# EAGLE board BattleBitsManualNoSound (EAGLE 9.3.2)
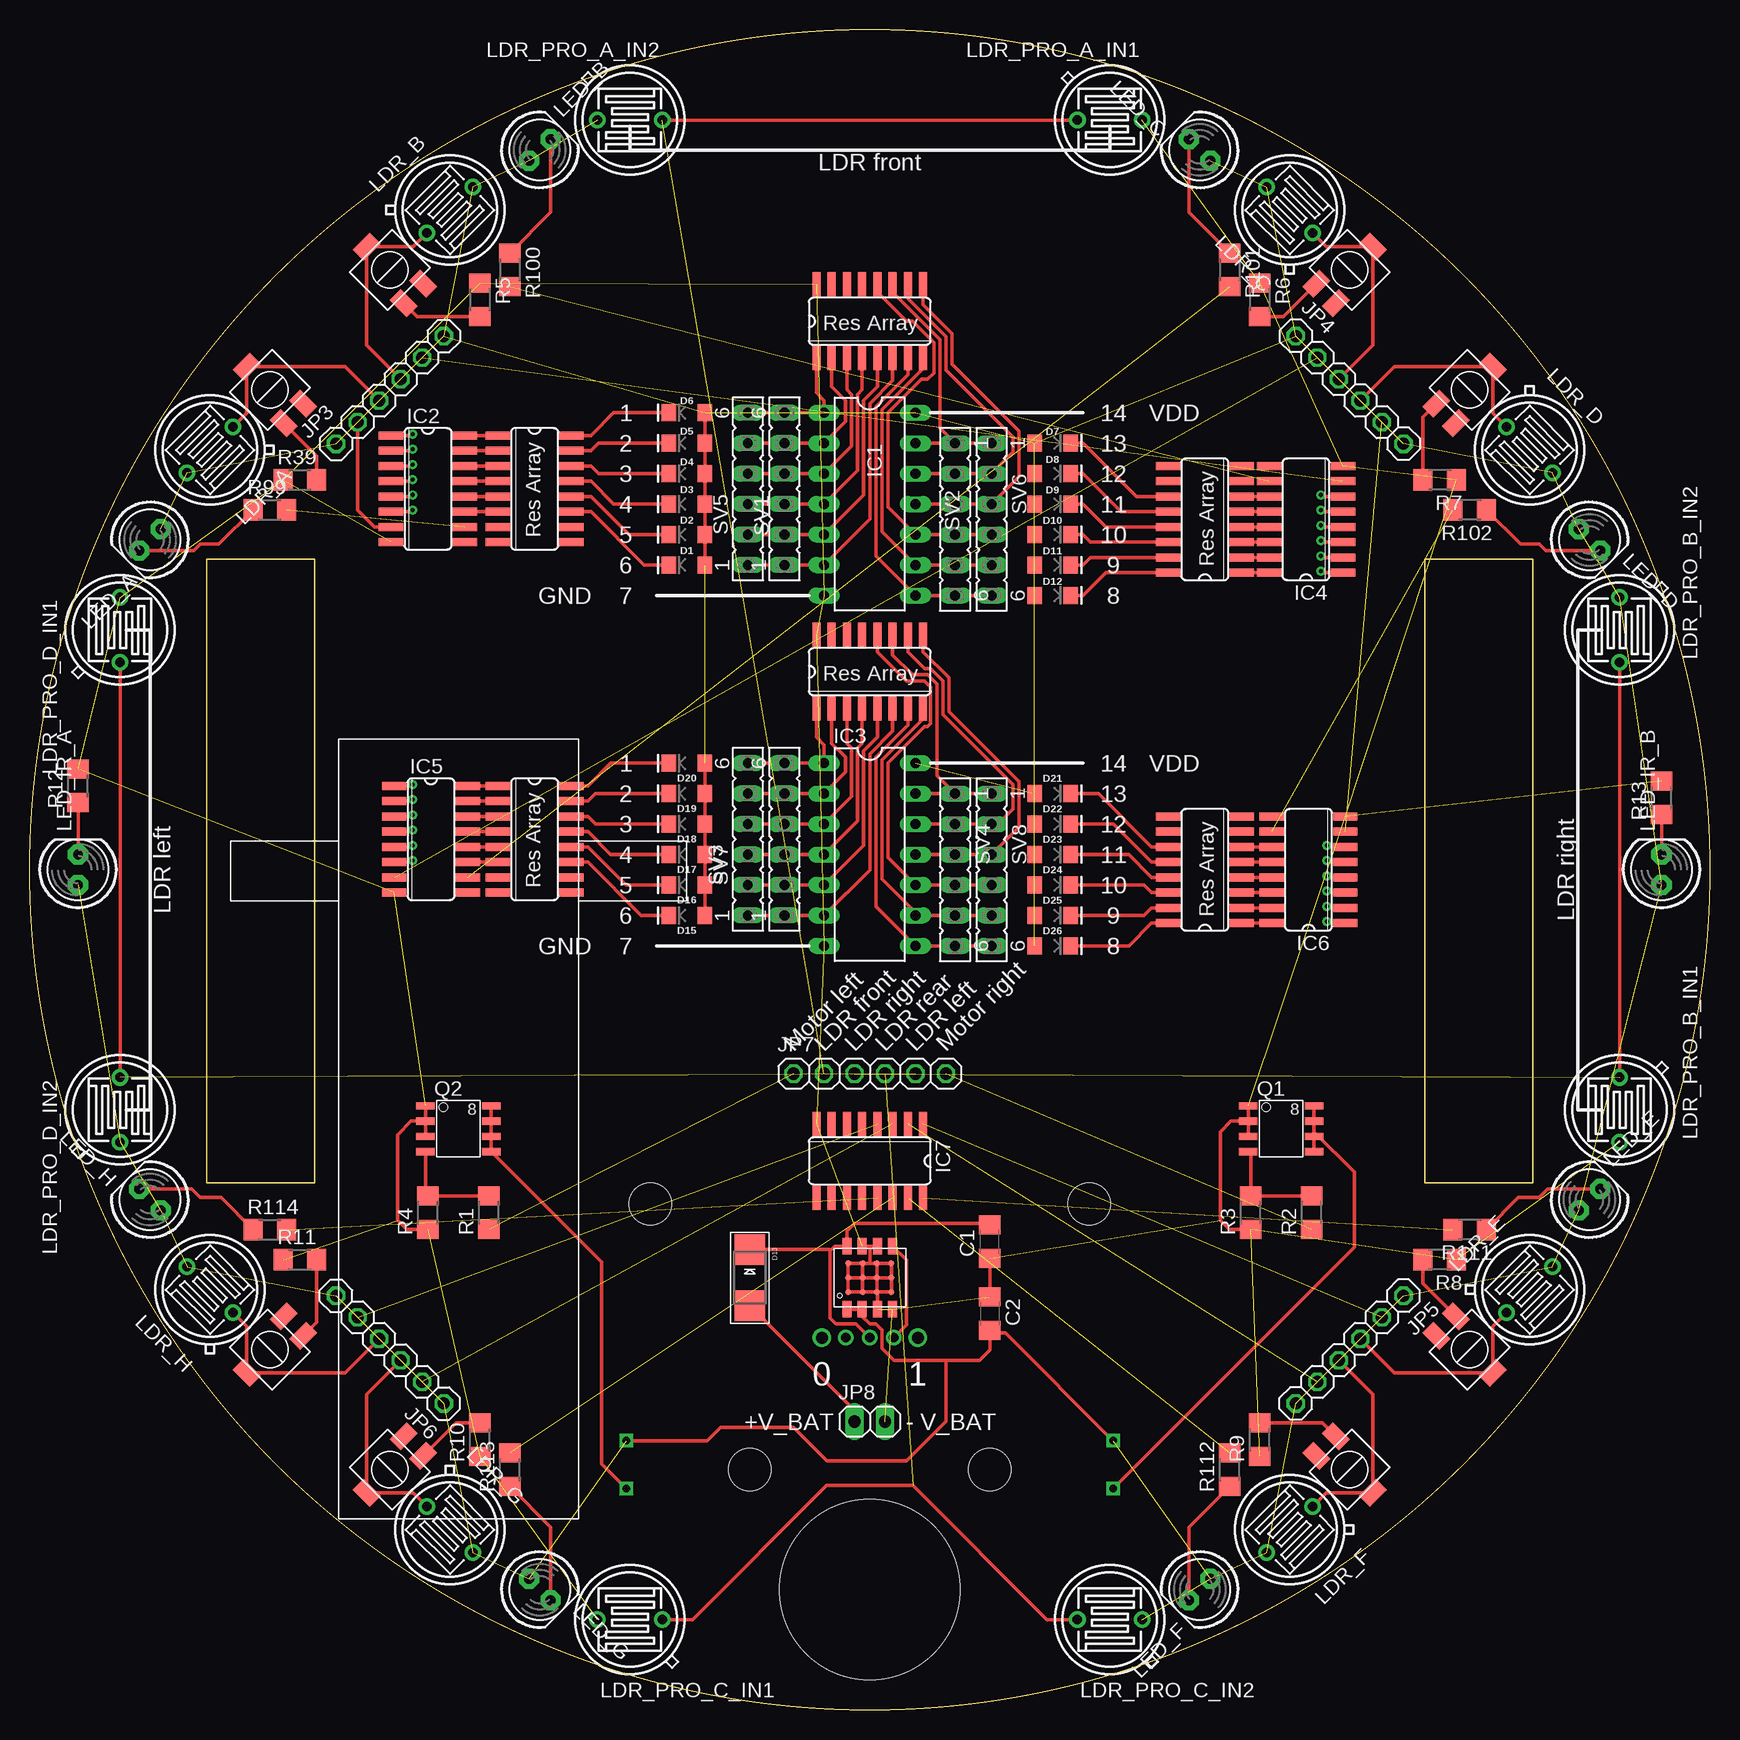
[diagram p0: board, top side]
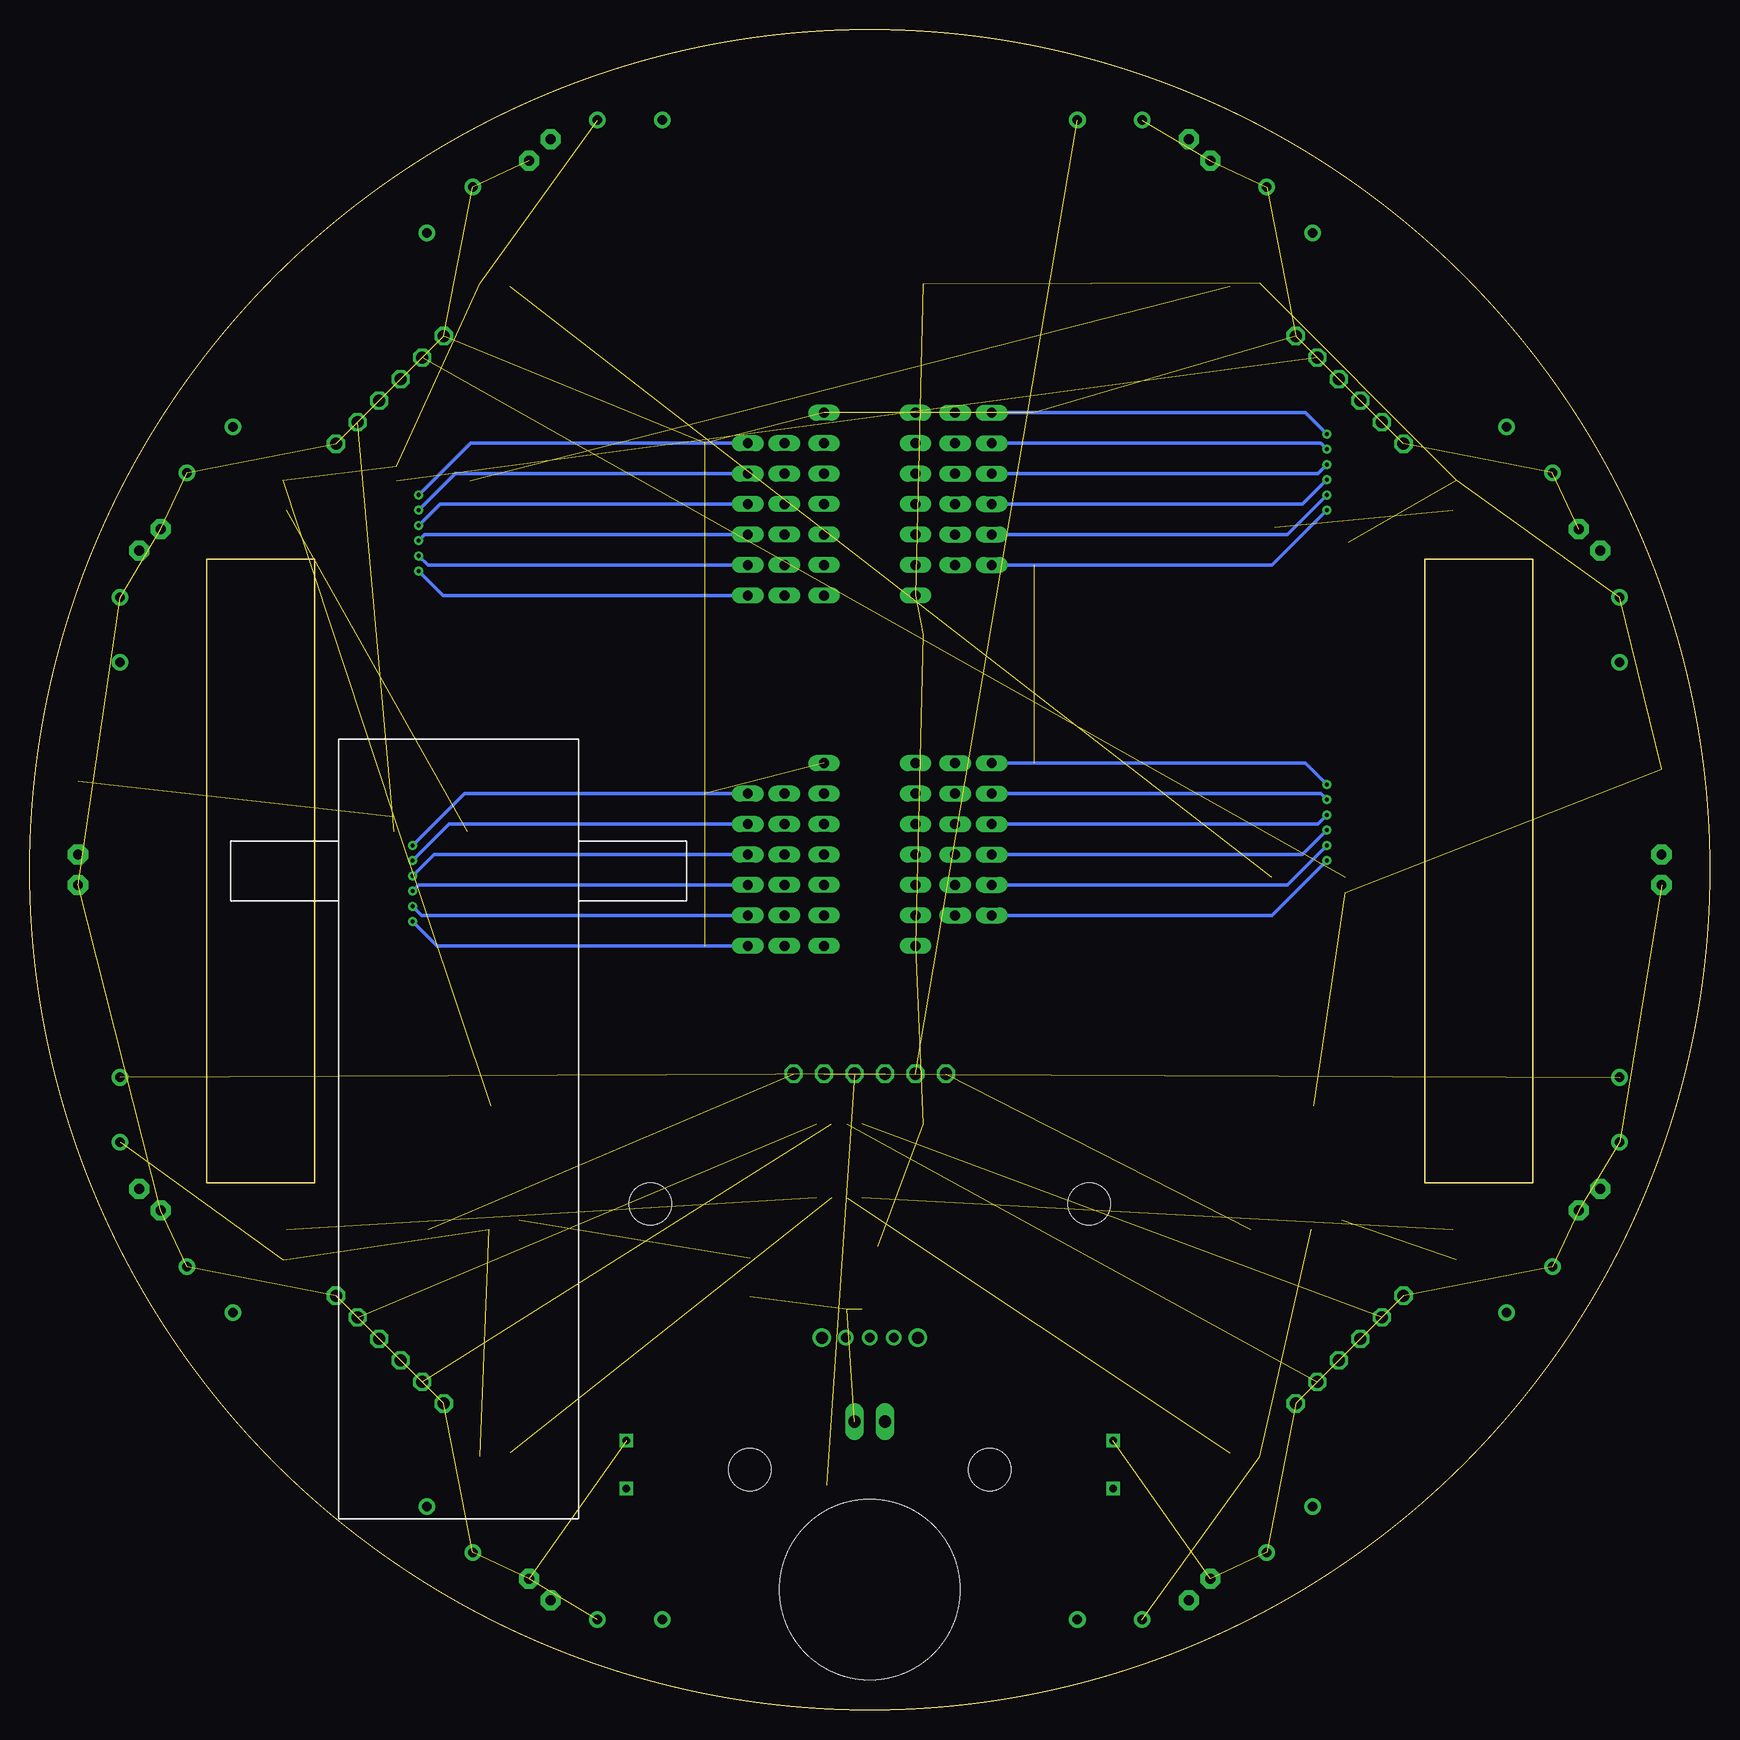
[diagram p1: board, bottom side, seen from below]

Size 140 x 140 mm. Coordinates in mm from the lower left corner, seen from the top.
Outline: circle at 70,70 radius 70
Copper layers (1*16): Top 0.035mm / dielectric 1.5mm / Bottom 0.035mm
Design rules "default *": minimum track width 6mil, minimum drill 0.35mm, track to track 6mil, track to pad 6mil, pad to pad 6mil, via to via 6mil, smd to smd 6mil, copper to edge 40mil, drill to drill 6mil, minimum pad ring 10mil, minimum via ring 8mil, stop-mask expansion 4mil, vias tented up to drill 0mil, thermal gap 10mil
Net classes: 0 PWR: width 0.305 mm, drill 0.3 mm, clearance 0.152 mm; 1 SIGNAL: width 0.305 mm, drill 0.3 mm, clearance 0.152 mm
Holes 15 mm at 70,10
Holes 3.5 mm at 60,20 80,20

## Footprints (pad centres in the part's own frame; a part is rotated, then mirrored left to right if it is on the bottom)
C3216 = smd 1.6 x 1.8: 1 -1.4,0; 2 1.4,0
LED-1206 = smd 1.2 x 1.4: A -1.5,0; C 1.5,0
SMADIODE = smd 2.54 x 2.54: A 2.349,0; C -2.349,0
DIL14 = drill 0.813 long: 1 -7.62,-3.81; 2 -5.08,-3.81; 3 -2.54,-3.81; 4 0,-3.81; 5 2.54,-3.81; 6 5.08,-3.81; 7 7.62,-3.81; 8 7.62,3.81; 9 5.08,3.81; 10 2.54,3.81; 11 0,3.81; 12 -2.54,3.81; 13 -5.08,3.81; 14 -7.62,3.81
SO16 = smd 0.66 x 2.032: 1 -4.445,-3.073; 2 -3.175,-3.073; 3 -1.905,-3.073; 4 -0.635,-3.073; 5 0.635,-3.073; 6 1.905,-3.073; 7 3.175,-3.073; 8 4.445,-3.073; 9 4.445,3.073; 10 3.175,3.073; 11 1.905,3.073; 12 0.635,3.073; 13 -0.635,3.073; 14 -1.905,3.073; 15 -3.175,3.073; 16 -4.445,3.073
1X06 = drill 1.016 octagon: 1 -6.35,0; 2 -3.81,0; 3 -1.27,0; 4 1.27,0; 5 3.81,0; 6 6.35,0
1X02 = drill 1.016 long: 1 -1.27,0; 2 1.27,0
TO-5_V10 = drill 0.8 pad 1.4: 1 -2.7,0; 2 2.7,0
LED5MM = drill 0.813 pad 1.676 octagon: A -1.27,0; K 1.27,0
SO-8 = smd 1.524 x 0.61: 1 -2.743,1.905; 2 -2.743,0.635; 3 -2.743,-0.635; 4 -2.743,-1.905; 5 2.743,-1.905; 6 2.743,-0.635; 7 2.743,0.635; 8 2.743,1.905
R3216 = smd 1.6 x 1.8: 1 -1.4,0; 2 1.4,0
FE06 = drill 0.813 long: 1 -6.35,0; 2 -3.81,0; 3 -1.27,0; 4 1.27,0; 5 3.81,0; 6 6.35,0
GEARMOTOR = drill 0.6 square: P$1 14,-30; P$2 14,-26 | hole 3.5: 16,-6.27
SO16' = smd 2.032 x 0.66: 1 -3.073,4.445; 2 -3.073,3.175; 3 -3.073,1.905; 4 -3.073,0.635; 5 -3.073,-0.635; 6 -3.073,-1.905; 7 -3.073,-3.175; 8 -3.073,-4.445; 9 3.073,-4.445; 10 3.073,-3.175; 11 3.073,-1.905; 12 3.073,-0.635; 13 3.073,0.635; 14 3.073,1.905; 15 3.073,3.175; 16 3.073,4.445
HTSOP-J8 = smd 1.35 x 0.75: EN 2.625,-1.905; GND_0 -2.625,-0.635; NC_0 -2.625,-1.905; NC_1 2.625,-0.635; NC_2 2.625,0.635; V_IN 2.625,1.905; V_OUT -2.625,1.905; V_OUT_MON -2.625,0.635 | smd 0.5 x 0.5: SUBSTRATE_0 -1.2,1.8; SUBSTRATE_1 -1.2,0.6; SUBSTRATE_2 -1.2,-0.6; SUBSTRATE_3 -1.2,-1.8; SUBSTRATE_4 0,1.8; SUBSTRATE_5 0,0.6; SUBSTRATE_6 0,-0.6; SUBSTRATE_7 0,-1.8; SUBSTRATE_8 1.2,1.8; SUBSTRATE_9 1.2,0.6; SUBSTRATE_10 1.2,-0.6; SUBSTRATE_11 1.2,-1.8
SLIDE_SWITCH = drill 0.8: COM 0,0; NC -2,0; NO 2,0 | drill 1: N.C.0 -4,0; N.C.1 4,0
23B-GULL_WING = smd 2 x 1.3: 1 2.75,-1.15; 3 2.75,1.15 | smd 1.3 x 2: 2 -2.75,0

## Placement (x,y rotation side)
C1  10uF  [C3216]  80,39 90 top
C2  10uF  [C3216]  80,33 270 top
D1  [LED-1206]  54.76,95.4 180 top
D2  [LED-1206]  54.76,97.94 180 top
D3  [LED-1206]  54.76,100.48 180 top
D4  [LED-1206]  54.76,103.02 180 top
D5  [LED-1206]  54.76,105.56 180 top
D6  [LED-1206]  54.76,108.1 180 top
D7  [LED-1206]  85.24,105.56 0 top
D8  [LED-1206]  85.24,103.02 0 top
D9  [LED-1206]  85.24,100.48 0 top
D10  [LED-1206]  85.24,97.94 0 top
D11  [LED-1206]  85.24,95.4 0 top
D12  [LED-1206]  85.24,92.86 0 top
D13  [SMADIODE]  60,36 270 top
D15  [LED-1206]  54.76,66.19 180 top
D16  [LED-1206]  54.76,68.73 180 top
D17  [LED-1206]  54.76,71.27 180 top
D18  [LED-1206]  54.76,73.81 180 top
D19  [LED-1206]  54.76,76.35 180 top
D20  [LED-1206]  54.76,78.89 180 top
D21  [LED-1206]  85.24,76.35 0 top
D22  [LED-1206]  85.24,73.81 0 top
D23  [LED-1206]  85.24,71.27 0 top
D24  [LED-1206]  85.24,68.73 0 top
D25  [LED-1206]  85.24,66.19 0 top
D26  [LED-1206]  85.24,63.65 0 top
IC1  4001N  [DIL14]  70,100.48 270 top
IC2  ULN2004AD  [SO16]  33.17,101.75 270 top
IC3  4001N  [DIL14]  70,71.27 270 top
IC4  ULN2004AD  [SO16]  106.37,99.21 90 top
IC5  ULN2004AD  [SO16]  33.42,72.54 270 top
IC6  ULN2004AD  [SO16]  106.58,70 90 top
IC7  ULN2004AD  [SO16]  70,45.73 180 top
JP3  [1X06]  30,110 45 top
JP4  [1X06]  110,110 315 top
JP5  [1X06]  110,30 225 top
JP6  [1X06]  30,30 135 top
JP7  [1X06]  70,53 0 top
JP8  [1X02]  70,24 0 top
LDR_A  V1060_21  [TO-5_V10]  15,105 45 top
LDR_B  V1060_21  [TO-5_V10]  35,125 225 top
LDR_C  V1060_21  [TO-5_V10]  105,125 315 top
LDR_D  V1060_21  [TO-5_V10]  125,105 135 top
LDR_E  V1060_21  [TO-5_V10]  125,35 225 top
LDR_F  V1060_21  [TO-5_V10]  105,15 45 top
LDR_G  V1060_21  [TO-5_V10]  35,15 135 top
LDR_H  V1060_21  [TO-5_V10]  15,35 315 top
LDR_PRO_A_IN1  V1060_21  [TO-5_V10]  90,132.5 180 top
LDR_PRO_A_IN2  V1060_21  [TO-5_V10]  50,132.5 180 top
LDR_PRO_B_IN1  V1060_21  [TO-5_V10]  132.5,50 90 top
LDR_PRO_B_IN2  V1060_21  [TO-5_V10]  132.5,90 90 top
LDR_PRO_C_IN1  V1060_21  [TO-5_V10]  50,7.5 0 top
LDR_PRO_C_IN2  V1060_21  [TO-5_V10]  90,7.5 0 top
LDR_PRO_D_IN1  V1060_21  [TO-5_V10]  7.5,90 270 top
LDR_PRO_D_IN2  V1060_21  [TO-5_V10]  7.5,50 270 top
LED_A  [LED5MM]  10,97.5 225 top
LED_B  [LED5MM]  42.5,130 45 top
LED_C  [LED5MM]  97.5,130 135 top
LED_D  [LED5MM]  130,97.5 315 top
LED_E  [LED5MM]  130,42.5 45 top
LED_F  [LED5MM]  97.5,10 225 top
LED_G  [LED5MM]  42.5,10 315 top
LED_H  [LED5MM]  10,42.5 135 top
LED_IR_A  [LED5MM]  4,70 90 top
LED_IR_B  [LED5MM]  136,70 90 top
Q1  FDS5680  [SO-8]  104.29,48.41 0 top
Q2  FDS5680  [SO-8]  35.71,48.41 0 top
R1  10K, 1%  [R3216]  38.25,41.42 90 top
R2  10K, 1%  [R3216]  106.83,41.42 90 top
R3  10K, 1%  [R3216]  101.75,41.42 90 top
R4  10K, 1%  [R3216]  33.17,41.42 90 top
R5  500, 1%  [R3216]  37.5,117.5 270 top
R6  500, 1%  [R3216]  102.5,117.5 270 top
R7  500, 1%  [R3216]  117.5,102.5 180 top
R8  500, 1%  [R3216]  117.5,37.5 180 top
R9  500, 1%  [R3216]  102.5,22.5 90 top
R10  500, 1%  [R3216]  37.5,22.5 90 top
R11  500, 1%  [R3216]  22.5,37.5 0 top
R12  100, 1%  [R3216]  4,77 90 top
R13  100, 1%  [R3216]  136,76 90 top
R39  500, 1%  [R3216]  22.5,102.5 0 top
R99  100, 1%  [R3216]  20,100 0 top
R100  100, 1%  [R3216]  40,120 270 top
R101  100, 1%  [R3216]  100,120 270 top
R102  100, 1%  [R3216]  120,100 180 top
R111  100, 1%  [R3216]  120,40 180 top
R112  100, 1%  [R3216]  100,20 90 top
R113  100, 1%  [R3216]  40,20 90 top
R114  100, 1%  [R3216]  20,40 0 top
SV1  [FE06]  62.89,101.75 90 top
SV2  [FE06]  77.11,99.21 270 top
SV3  [FE06]  62.89,72.54 90 top
SV4  [FE06]  77.11,70 270 top
SV5  [FE06]  59.84,101.75 90 top
SV6  [FE06]  80.16,99.21 270 top
SV7  [FE06]  59.84,72.54 90 top
SV8  [FE06]  80.16,70 270 top
U$1  MOTOR  [GEARMOTOR]  104.29,48.41 0 bottom
U$2  MOTOR  [GEARMOTOR]  35.71,48.41 0 top
U$3  15_RES_BUS_SOIC16  [SO16']  70,86.51 90 top
U$4  ROHM_LDO  [HTSOP-J8]  70,36 90 top
U$5  8_RES_ISO_SOIC-16  [SO16']  42.06,101.75 0 top
U$6  8_RES_ISO_SOIC-16  [SO16']  97.94,99.21 180 top
U$7  SLIDE_SWITCH  [SLIDE_SWITCH]  70,31 180 top
U$8  23B  [23B-GULL_WING]  20,110 315 top
U$9  8_RES_ISO_SOIC-16  [SO16']  42.06,72.54 0 top
U$10  8_RES_ISO_SOIC-16  [SO16']  97.94,70 180 top
U$11  15_RES_BUS_SOIC16  [SO16']  70,115.72 90 top
U$12  23B  [23B-GULL_WING]  30,120 315 top
U$13  23B  [23B-GULL_WING]  110,120 225 top
U$14  23B  [23B-GULL_WING]  120,110 225 top
U$15  23B  [23B-GULL_WING]  120,30 135 top
U$16  23B  [23B-GULL_WING]  110,20 135 top
U$17  23B  [23B-GULL_WING]  30,20 45 top
U$18  23B  [23B-GULL_WING]  20,30 45 top

## Library data of the parts
C1 C2 = rcl; SPICEPREFIX: C
D1-D12 D15-D26 = SparkFun-LED
D13 JP3-JP7 LED_A LED_B LED_C LED_D LED_E LED_F LED_G LED_H LED_IR_A LED_IR_B = adafruit
IC1 IC3 = 40xx
IC2 IC4-IC7 = uln-udn
JP8 = pinhead
LDR_A LDR_B LDR_C LDR_D LDR_E LDR_F LDR_G LDR_H LDR_PRO_A_IN1 LDR_PRO_A_IN2 LDR_PRO_B_IN1 LDR_PRO_B_IN2 LDR_PRO_C_IN1 LDR_PRO_C_IN2 LDR_PRO_D_IN1 LDR_PRO_D_IN2 = photo-elements
Q1 Q2 = transistor-fet
R1-R13 R39 R99-R102 R111-R114 = rcl; SPICEPREFIX: R
SV1-SV8 = con-lsta; OC_FARNELL: unknown; OC_NEWARK: unknown
U$1 U$2 = gearmotor
U$3 U$5 U$6 U$9-U$11 = resistorArrayBus
U$4 = Rohm-ldo
U$7 = SlideSwitch
U$8 U$12-U$18 = bourns_trimpot

## Nets
40XX_CH_A_IN_A [SIGNAL]: IC1.1 IC2.1 SV1.6 SV5.6 U$11.1
40XX_CH_A_IN_B [SIGNAL]: IC1.2 IC2.2 SV1.5 SV5.5 U$11.2
40XX_CH_A_OUT [SIGNAL]: IC1.3 IC2.3 SV1.4 SV5.4 U$11.3
40XX_CH_B_IN_A [SIGNAL]: IC1.5 IC2.5 SV1.2 SV5.2 U$11.5
40XX_CH_B_IN_B [SIGNAL]: IC1.6 IC2.6 SV1.1 SV5.1 U$11.6
40XX_CH_B_OUT [SIGNAL]: IC1.4 IC2.4 SV1.3 SV5.3 U$11.4
40XX_CH_C_IN_A [SIGNAL]: IC1.8 IC4.1 SV2.6 SV6.6 U$11.7
40XX_CH_C_IN_B [SIGNAL]: IC1.9 IC4.2 SV2.5 SV6.5 U$11.8
40XX_CH_C_OUT [SIGNAL]: IC1.10 IC4.3 SV2.4 SV6.4 U$11.12
40XX_CH_D_IN_A [SIGNAL]: IC1.12 IC4.5 SV2.2 SV6.2 U$11.10
40XX_CH_D_IN_B [SIGNAL]: IC1.13 IC4.6 SV2.1 SV6.1 U$11.11
40XX_CH_D_OUT [SIGNAL]: IC1.11 IC4.4 SV2.3 SV6.3 U$11.9
40XX_CH_E_IN_A [SIGNAL]: IC3.1 IC5.1 SV3.6 SV7.6 U$3.1
40XX_CH_E_IN_B [SIGNAL]: IC3.2 IC5.2 SV3.5 SV7.5 U$3.2
40XX_CH_E_OUT [SIGNAL]: IC3.3 IC5.3 SV3.4 SV7.4 U$3.3
40XX_CH_F_IN_A [SIGNAL]: IC3.5 IC5.5 SV3.2 SV7.2 U$3.5
40XX_CH_F_IN_B [SIGNAL]: IC3.6 IC5.6 SV3.1 SV7.1 U$3.6
40XX_CH_F_OUT [SIGNAL]: IC3.4 IC5.4 SV3.3 SV7.3 U$3.4
40XX_CH_G_IN_A [SIGNAL]: IC3.8 IC6.1 SV4.6 SV8.6 U$3.7
40XX_CH_G_IN_B [SIGNAL]: IC3.9 IC6.2 SV4.5 SV8.5 U$3.8
40XX_CH_G_OUT [SIGNAL]: IC3.10 IC6.3 SV4.4 SV8.4 U$3.12
40XX_CH_H_IN_A [SIGNAL]: IC3.12 IC6.5 SV4.2 SV8.2 U$3.10
40XX_CH_H_IN_B [SIGNAL]: IC3.13 IC6.6 SV4.1 SV8.1 U$3.11
40XX_CH_H_OUT [SIGNAL]: IC3.11 IC6.4 SV4.3 SV8.3 U$3.9
GND: C1.1 C2.1 IC1.7 IC2.8 IC3.7 IC4.8 IC5.8 IC6.8 IC7.8 JP8.2 LDR_PRO_A_IN1.1 LDR_PRO_B_IN1.1 LDR_PRO_C_IN1.1 LDR_PRO_D_IN1.1 Q1.1 Q1.2 Q1.3 Q2.1 Q2.2 Q2.3 R3.1 R4.1 R5.1 R6.1 R7.1 R8.1 R9.1 R10.1 R11.1 R12.2 R13.2 R39.1 U$3.16 U$4.GND_0 U$4.NC_0 U$4.NC_1 U$4.NC_2 U$4.SUBSTRATE_0 U$4.SUBSTRATE_1 U$4.SUBSTRATE_2 U$4.SUBSTRATE_3 U$4.SUBSTRATE_4 U$4.SUBSTRATE_5 U$4.SUBSTRATE_6 U$4.SUBSTRATE_7 U$4.SUBSTRATE_8 U$4.SUBSTRATE_9 U$4.SUBSTRATE_10 U$4.SUBSTRATE_11 U$11.16
LDR_CH_A_OUT [SIGNAL]: JP3.3 LDR_A.2 U$8.2
LDR_CH_B_OUT: JP3.4 LDR_B.2 U$12.2
LDR_CH_C_OUT [SIGNAL]: JP4.3 LDR_C.2 U$13.2
LDR_CH_D_OUT: JP4.4 LDR_D.2 U$14.2
LDR_CH_E_OUT [SIGNAL]: JP5.3 LDR_E.2 U$15.2
LDR_CH_F_OUT: JP5.4 LDR_F.2 U$16.2
LDR_CH_G_OUT [SIGNAL]: JP6.3 LDR_G.2 U$17.2
LDR_CH_H_OUT: JP6.4 LDR_H.2 U$18.2
LDR_PRO_A_OUT: JP7.2 LDR_PRO_A_IN1.2 LDR_PRO_A_IN2.1
LDR_PRO_B_OUT: JP7.3 LDR_PRO_B_IN1.2 LDR_PRO_B_IN2.1
LDR_PRO_C_OUT: JP7.4 LDR_PRO_C_IN1.2 LDR_PRO_C_IN2.1
LDR_PRO_D_OUT: JP7.5 LDR_PRO_D_IN1.2 LDR_PRO_D_IN2.1
LED_CH_A_IN [SIGNAL]: IC2.7 JP3.2
LED_CH_A_OUT: IC2.10 R99.2
LED_CH_B_IN [SIGNAL]: IC4.7 JP3.5
LED_CH_B_OUT: IC4.10 R100.2
LED_CH_C_IN [SIGNAL]: IC5.7 JP4.2
LED_CH_C_OUT: IC5.10 R101.2
LED_CH_D_IN [SIGNAL]: IC6.7 JP4.5
LED_CH_D_OUT: IC6.10 R102.2
LED_CH_E_IN [SIGNAL]: IC7.1 JP5.2
LED_CH_F_IN [SIGNAL]: IC7.2 JP5.5
LED_CH_G_IN [SIGNAL]: IC7.3 JP6.2
LED_CH_H_IN [SIGNAL]: IC7.4 JP6.5
MOTOR_A-: Q1.5 Q1.6 Q1.7 Q1.8 U$1.P$1
MOTOR_A_IN [SIGNAL]: JP7.1 R1.1
MOTOR_B-: Q2.5 Q2.6 Q2.7 Q2.8 U$2.P$1
MOTOR_B_IN [SIGNAL]: JP7.6 R2.1
N$5: IC2.16 U$5.1
N$6 [SIGNAL]: Q1.4 R2.2 R3.2
N$7 [SIGNAL]: Q2.4 R1.2 R4.2
N$8: IC2.15 U$5.2
N$9: IC2.14 U$5.3
N$10: IC2.13 U$5.4
N$11: IC2.12 U$5.5
N$12: IC2.11 U$5.6
N$13: IC6.16 U$10.1
N$14: IC4.16 U$6.1
N$15: IC4.15 U$6.2
N$16: IC4.14 U$6.3
N$17: IC4.13 U$6.4
N$18: IC4.12 U$6.5
N$19: IC4.11 U$6.6
N$20: D6.C U$5.16
N$21: IC6.14 U$10.3
N$22: D5.C U$5.15
N$23: IC5.16 U$9.1
N$24: D4.C U$5.14
N$25: IC5.15 U$9.2
N$26: D3.C U$5.13
N$27: IC5.14 U$9.3
N$28: D2.C U$5.12
N$29: IC5.13 U$9.4
N$30: D1.C U$5.11
N$31: IC5.12 U$9.5
N$32: IC5.11 U$9.6
N$33: IC6.15 U$10.2
N$34: IC6.13 U$10.4
N$35: IC6.12 U$10.5
N$36: D12.C U$6.16
N$37: D11.C U$6.15
N$38: IC6.11 U$10.6
N$39: D10.C U$6.14
N$40: D9.C U$6.13
N$41: D8.C U$6.12
N$42: D7.C U$6.11
N$44 [SIGNAL]: R39.2 U$8.1
N$45 [SIGNAL]: R5.2 U$12.1
N$46: IC7.16 R111.2
N$47: IC7.15 R112.2
N$48: IC7.14 R113.2
N$49: IC7.13 R114.2
N$50 [SIGNAL]: R6.2 U$13.1
N$51 [SIGNAL]: R7.2 U$14.1
N$52 [SIGNAL]: R8.2 U$15.1
N$53 [SIGNAL]: R9.2 U$16.1
N$54 [SIGNAL]: R10.2 U$17.1
N$55 [SIGNAL]: R11.2 U$18.1
N$57: U$3.13
N$58: U$3.14
N$59: U$3.15
N$61: D13.A JP8.1
N$62: U$4.EN U$7.NC
N$63: LED_IR_A.K R12.1
N$64: LED_IR_B.K R13.1
N$74: U$11.13
N$75: U$11.14
N$76: U$11.15
N$86: D20.C U$9.16
N$87: D19.C U$9.15
N$88: D18.C U$9.14
N$89: D17.C U$9.13
N$90: D16.C U$9.12
N$91: D15.C U$9.11
N$92: D26.C U$10.16
N$93: D25.C U$10.15
N$94: D24.C U$10.14
N$95: D23.C U$10.13
N$96: D22.C U$10.12
N$97: D21.C U$10.11
N$111: LED_A.K R99.1
N$112: LED_B.K R100.1
N$113: LED_C.K R101.1
N$114: LED_D.K R102.1
N$123: LED_E.K R111.1
N$124: LED_F.K R112.1
N$125: LED_G.K R113.1
N$126: LED_H.K R114.1
VBAT: C1.2 D13.C U$4.V_IN U$7.COM
VDD: C2.2 D1.A D2.A D3.A D4.A D5.A D6.A D7.A D8.A D9.A D10.A D11.A D12.A D15.A D16.A D17.A D18.A D19.A D20.A D21.A D22.A D23.A D24.A D25.A D26.A IC1.14 IC3.14 JP3.1 JP3.6 JP4.1 JP4.6 JP5.1 JP5.6 JP6.1 JP6.6 LDR_A.1 LDR_B.1 LDR_C.1 LDR_D.1 LDR_E.1 LDR_F.1 LDR_G.1 LDR_H.1 LDR_PRO_A_IN2.2 LDR_PRO_B_IN2.2 LDR_PRO_C_IN2.2 LDR_PRO_D_IN2.2 LED_A.A LED_B.A LED_C.A LED_D.A LED_E.A LED_F.A LED_G.A LED_H.A LED_IR_A.A LED_IR_B.A U$1.P$2 U$2.P$2 U$4.V_OUT U$4.V_OUT_MON

## Tracks (layer width: path | path; a pad name or v marks a point on that pad's centre or on a via)
40XX_CH_A_IN_A  (via drill 0.35)
  Top 0.305: U$11.1 65.56,109.75 66.19,109.12 IC1.1 SV1.6 SV5.6 | IC2.1 31.77,106.19 v31.9,106.32
  Bottom 0.305: v31.9,106.32 33.68,108.1 SV5.6
40XX_CH_A_IN_B  (via drill 0.35)
  Top 0.305: U$11.2 66.83,110.26 67.97,109.12 67.97,107.34 IC1.2 SV1.5 SV5.5 | IC2.2 31.77,104.92 v31.9,105.05
  Bottom 0.305: v31.9,105.05 32.41,105.56 SV5.5
40XX_CH_A_OUT  (via drill 0.35)
  Top 0.305: U$11.3 68.09,110 68.48,109.62 68.48,105.31 IC1.3 SV1.4 SV5.4 | IC2.3 31.77,103.66 v31.9,103.78
  Bottom 0.305: v31.9,103.78 32.66,103.02 SV5.4
40XX_CH_B_IN_A  (via drill 0.35)
  Top 0.305: U$11.5 70.64,110.26 69.49,109.12 69.49,101.24 IC1.5 SV1.2 SV5.2 | IC2.5 31.77,101.11 v31.9,101.24
  Bottom 0.305: v31.9,101.24 35.2,97.94 SV5.2
40XX_CH_B_IN_B  (via drill 0.35)
  Top 0.305: U$11.6 71.91,110.77 70,108.86 70,99.21 IC1.6 SV1.1 SV5.1 | IC2.6 31.77,99.84 v31.9,99.97
  Bottom 0.305: v31.9,99.97 36.47,95.4 SV5.1
40XX_CH_B_OUT  (via drill 0.35)
  Top 0.305: U$11.4 69.36,110 68.98,109.62 68.98,103.27 IC1.4 SV1.3 SV5.3 | IC2.4 31.77,102.38 v31.9,102.51
  Bottom 0.305: v31.9,102.51 33.93,100.48 SV5.3
40XX_CH_C_IN_A  (via drill 0.35)
  Top 0.305: SV6.6 SV2.6 IC1.8 70.51,96.16 70.51,108.61 73.17,111.28 U$11.7 | IC4.1 107.72,94.77 v107.59,94.89
  Bottom 0.305: v107.59,94.89 105.56,92.86 SV6.6
40XX_CH_C_IN_B  (via drill 0.35)
  Top 0.305: SV6.5 SV2.5 IC1.9 71.02,98.19 71.02,108.35 74.44,111.78 U$11.8 | IC4.2 107.72,96.03 v107.59,96.16
  Bottom 0.305: v107.59,96.16 106.83,95.4 SV6.5
40XX_CH_C_OUT  (via drill 0.35)
  Top 0.305: SV6.4 SV2.4 IC1.10 71.52,100.23 71.52,108.1 74.32,110.89 74.83,110.89 75.33,111.4 75.33,113.94 73.56,115.72 73.05,115.72 70.64,118.13 U$11.12 | IC4.3 107.72,97.31 v107.59,97.43
  Bottom 0.305: v107.59,97.43 107.08,97.94 SV6.4
40XX_CH_D_IN_A  (via drill 0.35)
  Top 0.305: IC1.12 SV2.2 SV6.2 81.94,104.8 81.94,106.07 76.35,111.66 76.35,114.45 73.17,117.62 U$11.10 | IC4.5 107.72,99.84 v107.59,99.97
  Bottom 0.305: v107.59,99.97 104.54,103.02 SV6.2
40XX_CH_D_IN_B  (via drill 0.35)
  Top 0.305: IC1.13 SV2.1 | SV2.1 SV6.1 | IC4.6 107.72,101.11 v107.59,101.24 | SV2.1 75.84,106.83 75.84,114.2 71.91,118.13 U$11.11
  Bottom 0.305: v107.59,101.24 103.27,105.56 SV6.1
40XX_CH_D_OUT  (via drill 0.35)
  Top 0.305: IC1.11 SV2.3 SV6.3 82.45,102.77 82.45,106.58 76.86,112.16 76.86,114.7 74.44,117.12 U$11.9 | IC4.4 107.72,98.58 v107.59,98.7
  Bottom 0.305: v107.59,98.7 105.81,100.48 SV6.3
40XX_CH_E_IN_A  (via drill 0.35)
  Top 0.305: SV7.6 SV3.6 IC3.1 66.19,80.41 65.56,81.05 U$3.1 | IC5.1 31.77,76.98 v31.9,77.11
  Bottom 0.305: v31.9,77.11 33.68,78.89 SV7.6
40XX_CH_E_IN_B  (via drill 0.35)
  Top 0.305: SV7.5 SV3.5 IC3.2 67.97,78.13 67.97,79.4 66.83,80.54 U$3.2 | IC5.2 31.77,75.72 v31.9,75.84
  Bottom 0.305: v31.9,75.84 32.41,76.35 SV7.5
40XX_CH_E_OUT  (via drill 0.35)
  Top 0.305: SV7.4 SV3.4 IC3.3 68.48,76.1 68.48,80.16 68.09,80.54 U$3.3 | IC5.3 31.77,74.44 v31.9,74.57
  Bottom 0.305: v31.9,74.57 32.66,73.81 SV7.4
40XX_CH_F_IN_A  (via drill 0.35)
  Top 0.305: SV7.2 SV3.2 IC3.5 69.49,72.03 69.49,79.91 70.64,81.05 U$3.5 | IC5.5 31.77,71.91 v31.9,72.03
  Bottom 0.305: v31.9,72.03 35.2,68.73 SV7.2
40XX_CH_F_IN_B  (via drill 0.35)
  Top 0.305: SV7.1 SV3.1 IC3.6 70,70 70,79.65 71.91,81.56 U$3.6 | IC5.6 31.77,70.64 v31.9,70.76
  Bottom 0.305: v31.9,70.76 36.47,66.19 SV7.1
40XX_CH_F_OUT  (via drill 0.35)
  Top 0.305: SV7.3 SV3.3 IC3.4 68.98,74.06 68.98,80.16 69.36,80.54 U$3.4 | IC5.4 31.77,73.17 v31.9,73.3
  Bottom 0.305: v31.9,73.3 33.93,71.27 SV7.3
40XX_CH_G_IN_A  (via drill 0.35)
  Top 0.305: SV8.6 SV4.6 IC3.8 70.51,66.95 70.51,79.4 73.17,82.06 U$3.7 | IC6.1 108.23,65.56 v108.1,65.68
  Bottom 0.305: v108.1,65.68 106.07,63.65 SV8.6
40XX_CH_G_IN_B  (via drill 0.35)
  Top 0.305: SV8.5 SV4.5 IC3.9 73.81,66.44 71.02,69.24 71.02,79.14 74.44,82.57 U$3.8 74.29,83.44 | IC6.2 108.23,66.83 v108.1,66.95
  Bottom 0.305: v108.1,66.95 107.34,66.19 SV8.5
40XX_CH_G_OUT  (via drill 0.35)
  Top 0.305: SV8.4 SV4.4 IC3.10 71.52,71.02 71.52,78.89 74.57,81.94 74.83,81.94 75.08,82.19 75.08,85.24 74.57,85.75 73.05,85.75 70.64,88.16 U$3.12 | IC6.3 108.23,68.09 v108.1,68.22
  Bottom 0.305: v108.1,68.22 107.59,68.73 SV8.4
40XX_CH_H_IN_A  (via drill 0.35)
  Top 0.305: IC3.12 SV4.2 SV8.2 80.67,73.81 81.94,75.08 81.94,77.11 76.1,82.95 76.1,85.75 75.08,86.76 74.57,86.76 73.17,88.16 U$3.10 | IC6.5 108.23,70.64 v108.1,70.76
  Bottom 0.305: v108.1,70.76 105.05,73.81 SV8.2
40XX_CH_H_IN_B  (via drill 0.35)
  Top 0.305: IC3.13 SV4.1 | SV4.1 SV8.1 | SV4.1 75.59,77.87 75.59,85.49 74.83,86.26 73.56,86.26 71.91,87.91 U$3.11 | IC6.6 108.23,71.91 v108.1,72.03
  Bottom 0.305: v108.1,72.03 103.78,76.35 SV8.1
40XX_CH_H_OUT  (via drill 0.35)
  Top 0.305: IC3.11 SV4.3 SV8.3 82.45,73.56 82.45,77.37 76.6,83.21 76.6,86 74.44,88.16 U$3.9 | IC6.4 108.23,69.36 v108.1,69.49
  Bottom 0.305: v108.1,69.49 106.32,71.27 SV8.3
GND  (28 unrouted)
  Top 0.305: C1.1 C2.1 | U$4.NC_1 70,38.62 | 70,38.62 U$4.NC_2 | U$4.SUBSTRATE_9 U$4.SUBSTRATE_8 U$4.SUBSTRATE_4 | U$4.SUBSTRATE_9 U$4.SUBSTRATE_5 | U$4.SUBSTRATE_5 U$4.SUBSTRATE_4 | U$4.SUBSTRATE_9 70,37.2 | 70,37.2 U$4.SUBSTRATE_10 | U$4.SUBSTRATE_10 U$4.SUBSTRATE_6 | U$4.SUBSTRATE_6 U$4.SUBSTRATE_5 | U$4.SUBSTRATE_5 U$4.SUBSTRATE_1 | U$4.SUBSTRATE_1 U$4.SUBSTRATE_0 U$4.SUBSTRATE_4 | U$4.SUBSTRATE_1 U$4.SUBSTRATE_2 | U$4.SUBSTRATE_2 U$4.SUBSTRATE_6 | U$4.SUBSTRATE_6 U$4.SUBSTRATE_7 | U$4.SUBSTRATE_7 U$4.SUBSTRATE_11 U$4.SUBSTRATE_10 | U$4.SUBSTRATE_2 U$4.SUBSTRATE_3 U$4.SUBSTRATE_7 | U$4.GND_0 70.64,34.77 U$4.SUBSTRATE_2 | 70,37.2 70,38.62 | Q2.3 Q2.2 | Q2.2 Q2.1 | Q2.2 31.77,49.05 30.63,47.9 30.63,40.79 31.4,40.02 R4.1 | Q1.3 Q1.2 | Q1.2 Q1.1 | Q1.2 100.1,49.05 99.21,48.16 99.21,40.79 99.97,40.02 R3.1
LDR_CH_A_OUT
  Top 0.305: JP3.3 26.26,111.94 U$8.2 18.05,108.06 LDR_A.2
LDR_CH_B_OUT
  Top 0.305: JP3.4 28.05,113.74 U$12.2 31.95,121.94 LDR_B.2
LDR_CH_C_OUT
  Top 0.305: JP4.3 111.94,113.74 U$13.2 108.06,121.94 LDR_C.2
LDR_CH_D_OUT
  Top 0.305: JP4.4 113.74,111.94 U$14.2 121.94,108.06 LDR_D.2
LDR_CH_E_OUT
  Top 0.305: JP5.3 113.74,28.05 U$15.2 121.94,31.95 LDR_E.2
LDR_CH_F_OUT
  Top 0.305: JP5.4 111.94,26.26 U$16.2 108.06,18.05 LDR_F.2
LDR_CH_G_OUT
  Top 0.305: JP6.3 28.05,26.26 U$17.2 31.95,18.05 LDR_G.2
LDR_CH_H_OUT
  Top 0.305: JP6.4 26.26,28.05 U$18.2 18.05,31.95 LDR_H.2
LDR_PRO_A_OUT  (1 unrouted)
  Top 0.305: LDR_PRO_A_IN2.1 LDR_PRO_A_IN1.2
LDR_PRO_B_OUT  (1 unrouted)
  Top 0.305: LDR_PRO_B_IN2.1 LDR_PRO_B_IN1.2
LDR_PRO_C_OUT  (1 unrouted)
  Top 0.305: LDR_PRO_C_IN1.2 55.24,7.5 66.41,18.67 73.59,18.67 84.76,7.5 LDR_PRO_C_IN2.1
LDR_PRO_D_OUT  (1 unrouted)
  Top 0.305: LDR_PRO_D_IN1.2 LDR_PRO_D_IN2.1
LED_CH_A_IN
  Top 0.305: IC2.7 28.73,98.58 27.31,99.99 JP3.2
LED_CH_A_OUT  (1 unrouted)
LED_CH_B_IN  (1 unrouted)
LED_CH_B_OUT  (1 unrouted)
LED_CH_C_IN  (1 unrouted)
LED_CH_C_OUT  (1 unrouted)
LED_CH_D_IN  (1 unrouted)
LED_CH_D_OUT  (1 unrouted)
LED_CH_E_IN  (1 unrouted)
LED_CH_F_IN  (1 unrouted)
LED_CH_G_IN  (1 unrouted)
LED_CH_H_IN  (1 unrouted)
MOTOR_A-
  Top 0.305: Q1.8 Q1.7 107.03,48.16 | 107.03,48.16 Q1.6 Q1.5 | 107.03,48.16 110.39,44.8 110.39,38.51 U$1.P$1
MOTOR_A_IN  (1 unrouted)
MOTOR_B-
  Top 0.305: Q2.8 Q2.7 Q2.6 Q2.5 47.65,37.31 47.65,20.47 U$2.P$1
MOTOR_B_IN  (1 unrouted)
N$5
  Top 0.305: IC2.16 U$5.1
N$6
  Top 0.305: R2.2 R3.2 101.75,46.3 Q1.4
N$7
  Top 0.305: R1.2 R4.2 32.97,43.03 Q2.4
N$8
  Top 0.305: U$5.2 IC2.15
N$9
  Top 0.305: IC2.14 U$5.3
N$10
  Top 0.305: U$5.4 IC2.13
N$11
  Top 0.305: IC2.12 U$5.5
N$12
  Top 0.305: U$5.6 IC2.11
N$13
  Top 0.305: IC6.16 U$10.1
N$14
  Top 0.305: U$6.1 IC4.16
N$15
  Top 0.305: IC4.15 U$6.2
N$16
  Top 0.305: U$6.3 IC4.14
N$17
  Top 0.305: U$6.4 IC4.13
N$18
  Top 0.305: IC4.12 U$6.5
N$19
  Top 0.305: U$6.6 IC4.11
N$20
  Top 0.305: U$5.16 46.76,106.19 48.66,108.1 D6.C
N$21
  Top 0.305: IC6.14 U$10.3
N$22
  Top 0.305: U$5.15 46.76,104.92 47.39,105.56 D5.C
N$23
  Top 0.305: IC5.16 U$9.1
N$24
  Top 0.305: U$5.14 46.76,103.66 47.39,103.02 D4.C
N$25
  Top 0.305: U$9.2 IC5.15
N$26
  Top 0.305: U$5.13 46.76,102.38 48.66,100.48 D3.C
N$27
  Top 0.305: IC5.14 U$9.3
N$28
  Top 0.305: U$5.12 46.76,101.11 49.93,97.94 D2.C
N$29
  Top 0.305: U$9.4 IC5.13
N$30
  Top 0.305: U$5.11 46.76,99.84 51.2,95.4 D1.C
N$31
  Top 0.305: IC5.12 U$9.5
N$32
  Top 0.305: U$9.6 IC5.11
N$33
  Top 0.305: U$10.2 IC6.15
N$34
  Top 0.305: U$10.4 IC6.13
N$35
  Top 0.305: U$10.5 IC6.12
N$36
  Top 0.305: D12.C 87.78,92.86 89.69,94.77 U$6.16
N$37
  Top 0.305: D11.C 87.78,95.4 88.41,96.03 U$6.15
N$38
  Top 0.305: U$10.6 IC6.11
N$39
  Top 0.305: D10.C 87.78,97.94 88.41,97.31 U$6.14
N$40
  Top 0.305: D9.C 87.78,100.48 89.69,98.58 U$6.13
N$41
  Top 0.305: D8.C 87.78,103.02 90.95,99.84 U$6.12
N$42
  Top 0.305: U$6.11 92.22,101.11 87.78,105.56 D7.C
N$44
  Top 0.305: U$8.1 23.9,104.47 R39.2
N$45
  Top 0.305: U$12.1 32.27,116.1 R5.2
N$46  (1 unrouted)
N$47  (1 unrouted)
N$48  (1 unrouted)
N$49  (1 unrouted)
N$50
  Top 0.305: U$13.1 104.47,116.1 R6.2
N$51
  Top 0.305: U$14.1 116.1,107.73 R7.2
N$52
  Top 0.305: U$15.1 116.1,35.53 R8.2
N$53
  Top 0.305: U$16.1 107.73,23.9 R9.2
N$54
  Top 0.305: U$17.1 35.53,23.9 R10.2
N$55
  Top 0.305: U$18.1 23.9,32.27 R11.2
N$61
  Top 0.305: D13.A 68.73,24.92 JP8.1
N$62
  Top 0.305: U$4.EN 73.05,37.48 73.05,32.05 U$7.NC
N$63
  Top 0.305: R12.1 LED_IR_A.K
N$64
  Top 0.305: R13.1 LED_IR_B.K
N$86
  Top 0.305: U$9.16 46.5,76.98 48.41,78.89 D20.C
N$87
  Top 0.305: U$9.15 46.5,75.72 47.14,76.35 D19.C
N$88
  Top 0.305: U$9.14 46.5,74.44 47.14,73.81 D18.C
N$89
  Top 0.305: U$9.13 46.5,73.17 48.41,71.27 D17.C
N$90
  Top 0.305: U$9.12 46.5,71.91 46.63,71.78 49.68,68.73 D16.C
N$91
  Top 0.305: U$9.11 46.5,70.64 50.95,66.19 D15.C
N$92
  Top 0.305: U$10.16 93.5,65.56 91.59,63.65 D26.C
N$93
  Top 0.305: U$10.15 93.5,66.83 92.86,66.19 D25.C
N$94
  Top 0.305: U$10.14 93.5,68.09 92.86,68.73 D24.C
N$95
  Top 0.305: U$10.13 93.5,69.36 91.59,71.27 D23.C
N$96
  Top 0.305: U$10.12 93.5,70.64 90.32,73.81 D22.C
N$97
  Top 0.305: U$10.11 93.5,71.91 89.05,76.35 D21.C
N$111
  Top 0.305: R99.1 15.74,97.14 14.2,97.14 13.66,96.6 LED_A.K
N$112
  Top 0.305: R100.1 43.4,124.8 LED_B.K
N$113
  Top 0.305: R101.1 96.6,124.8 LED_C.K
N$114
  Top 0.305: R102.1 124.26,97.14 125.8,97.14 126.34,96.6 LED_D.K
N$123
  Top 0.305: R111.1 124.08,42.68 125.8,42.68 126.52,43.4 LED_E.K
N$124
  Top 0.305: R112.1 96.6,15.2 LED_F.K
N$125
  Top 0.305: R113.1 43.4,15.2 LED_G.K
N$126
  Top 0.305: R114.1 15.92,42.68 14.2,42.68 13.48,43.4 LED_H.K
VBAT
  Top 0.305: U$7.COM 68.85,32.15 67.21,32.15 66.7,32.66 66.7,38.25 | 66.7,38.25 67.07,38.62 U$4.V_IN 68.09,39.9 68.73,40.54 79.86,40.54 C1.2 | D13.C 66.6,38.35 66.7,38.25
VDD  (46 unrouted)
  Top 0.305: D20.A D19.A D18.A D17.A D16.A D15.A | D1.A D2.A D3.A D4.A D5.A D6.A | U$4.V_OUT U$4.V_OUT_MON 69.36,32.79 70,32.15 70.51,32.15 71.02,31.65 71.02,30.12 72.03,29.11 76.35,29.11 | 80,31.39 80,29.96 79.14,29.11 76.35,29.11 | 80,31.39 C2.2 | U$1.P$2 81.31,31.39 80,31.39 | U$2.P$2 56.45,22.41 57.55,23.52 63.65,23.52 66.44,20.72 73.05,20.72 76.35,24.03 76.35,29.11

## Text on the board
_tsilk: LDR front | 1 | 14 | VDD | 2 | 13 | 3 | 12 | 4 | 11 | 5 | 10 | 6 | 9 | GND | 7 | 8 | 1 | 14 | VDD | 2 | 13 | 3 | 12 | 4 | 11 | LDR left | LDR right | 5 | 10 | 6 | 9 | GND | 7 | 8 | Motor left | LDR front | LDR right | LDR rear | LDR left | Motor right | 0 | 1 | +V_BAT | - V_BAT